# EAGLE board OTOduinoShield (EAGLE 5.11)
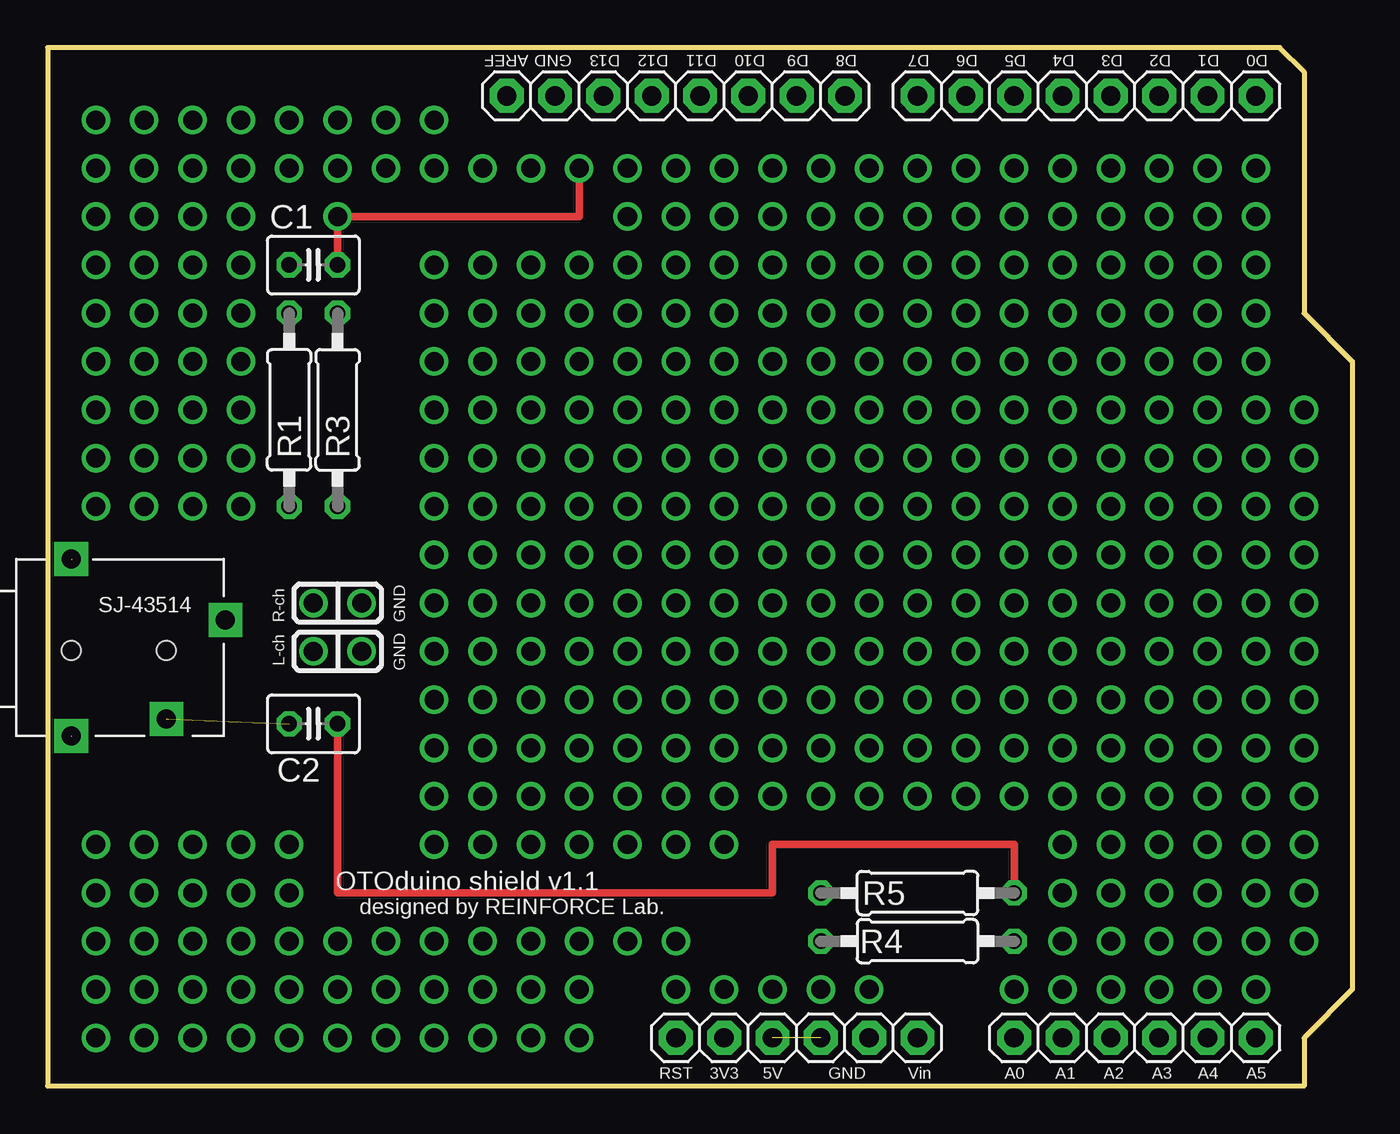
[diagram p0: board, top side]
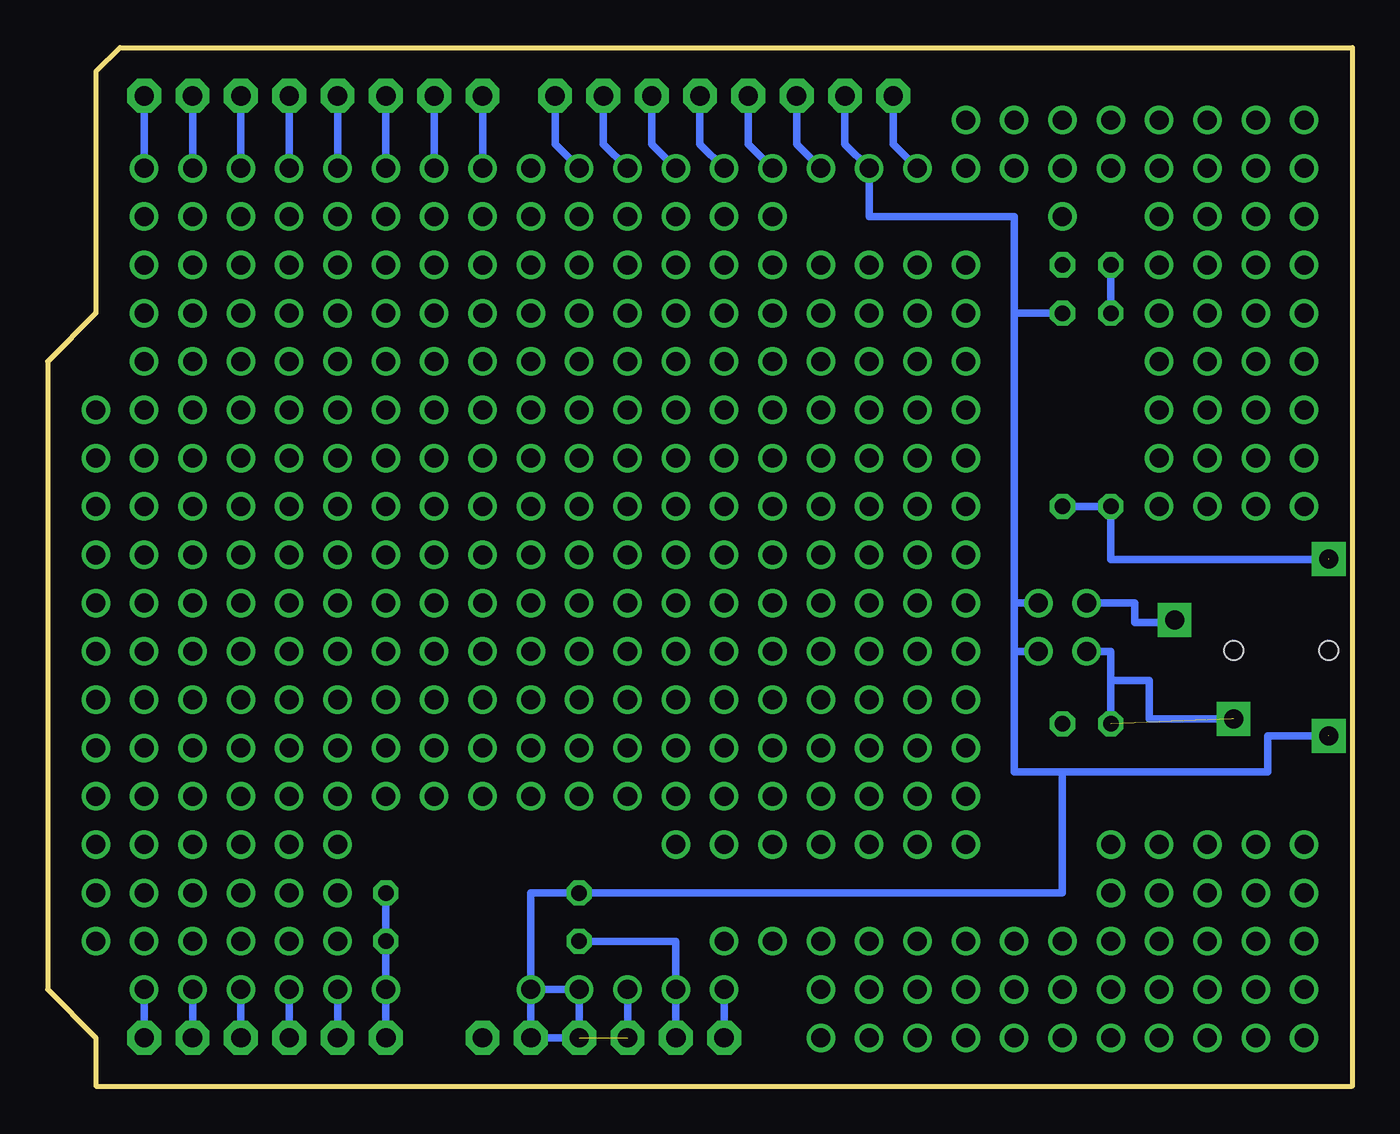
[diagram p1: board, bottom side, seen from below]

Size 68.58 x 54.61 mm. Coordinates in mm from the lower left corner, seen from the top.
Outline: 64.77,54.61 0,54.61 0,0 66.04,0 66.04,2.54 68.58,5.08 68.58,38.1 66.04,40.64 66.04,53.34 64.77,54.61
Copper layers (1*16): Top 0.035mm / dielectric 1.5mm / Bottom 0.035mm
Design rules "Fusion_eagle_rule_v1.1 *": minimum track width 6mil, minimum drill 12mil, track to track 6mil, track to pad 6mil, pad to pad 6mil, via to via 6mil, smd to smd 0mil, copper to edge 10mil, drill to drill 10mil, minimum pad ring 10mil, minimum via ring 6mil, stop-mask expansion 2mil, vias tented up to drill 100mil, thermal gap 10mil
Net classes: 1 power: width 0.254 mm

## Footprints (pad centres in the part's own frame; a part is rotated, then mirrored left to right if it is on the bottom)
C025-030X050 = drill 0.813 octagon: 1 -1.27,0; 2 1.27,0
1X06 = drill 1.016 pad 1.778 octagon: 1 -6.35,0; 2 -3.81,0; 3 -1.27,0; 4 1.27,0; 5 3.81,0; 6 6.35,0
1X08 = drill 1.016 pad 1.778 octagon: 1 -8.89,0; 2 -6.35,0; 3 -3.81,0; 4 -1.27,0; 5 1.27,0; 6 3.81,0; 7 6.35,0; 8 8.89,0
0207/10 = drill 0.813 octagon: 1 -5.08,0; 2 5.08,0
SJ43514 = drill 1 pad 1.778 square: P$1 10.998,6.096; P$4 7.899,0.889; P$5 2.896,9.296; P$6 2.896,0 | hole 1: 2.896,4.496; 7.899,4.496

## Placement (x,y rotation side)
C1  0.1uF  [C025-030X050]  13.97,43.18 0 top
C2  0.1uF  [C025-030X050]  13.97,19.05 0 top
JP10  POWER  [1X06]  39.37,2.54 180 top
JP11  ADC  [1X06]  57.15,2.54 180 top
JP12  IOH  [1X08]  33.02,52.07 180 top
JP13  IOL  [1X08]  54.61,52.07 180 top
R1  68k  [0207/10]  12.7,35.56 90 top
R3  1k  [0207/10]  15.24,35.56 270 top
R4  20k  [0207/10]  45.72,7.62 180 top
R5  20k  [0207/10]  45.72,10.16 0 top
U$3  SJ-43514  [SJ43514]  -1.65,18.41 0 top

## Library data of the parts
C1 C2 R1 R3-R5 = resistor
JP10-JP13 = pinhead2
U$3 = con-cui-audiojack

## Nets
+3V3: JP10.5 R4.2
+5V [power]: JP10.2 JP10.3 JP10.4 JP12.7 R3.1 R5.1 U$3.P$6
A0: C2.2 JP11.6 R4.1 R5.2
A1: JP11.5
A2: JP11.4
A3: JP11.3
A4: JP11.2
A5: JP11.1
AREF: JP12.8
D0: JP13.1
D1: JP13.2
D2: JP13.3
D3: JP13.4
D4: JP13.5
D5: JP13.6
D6: JP13.7
D7: JP13.8
D8: JP12.1
D9: JP12.2
D10: JP12.3
D11: JP12.4
D12: JP12.5
D13: C1.2 JP12.6
L_CH: C2.1 U$3.P$4
N$76: R1.1 R3.2 U$3.P$5
N$185: C1.1 R1.2
R_CH: U$3.P$1
RESET: JP10.6
VIN: JP10.1

## Tracks (layer width: path | path; a pad name or v marks a point on that pad's centre or on a via)
+3V3  (via drill 1)
  Bottom 0.406: JP10.5 v35.56,5.08 35.56,7.62 R4.2
+5V  (via drill 1)  (2 unrouted)
  Bottom 0.406: JP12.7 26.67,49.53 v25.4,48.26 25.4,45.72 17.78,45.72 17.78,40.64 | JP10.4 v38.1,5.08 | v43.18,5.08 JP10.2 JP10.3 v40.64,5.08 v43.18,5.08 | 17.78,40.64 R3.1 | 17.78,25.4 v16.51,25.4 | 17.78,25.4 17.78,40.64 | v43.18,5.08 43.18,10.16 R5.1 15.24,10.16 15.24,16.51 | 17.78,22.86 17.78,25.4 | 17.78,22.86 v16.51,22.86 | 17.78,22.86 17.78,16.51 15.24,16.51 | 15.24,16.51 4.45,16.51 4.45,18.41 1.27,18.41
A0  (via drill 1)
  Top 0.406: C2.2 15.24,10.16 38.1,10.16 38.1,12.7 50.8,12.7 R5.2
  Bottom 0.406: R5.2 R4.1 v50.8,5.08 JP11.6
A1  (via drill 1)
  Bottom 0.406: JP11.5 v53.34,5.08
A2  (via drill 1)
  Bottom 0.406: JP11.4 v55.88,5.08
A3  (via drill 1)
  Bottom 0.406: JP11.3 v58.42,5.08
A4  (via drill 1)
  Bottom 0.406: JP11.2 v60.96,5.08
A5  (via drill 1)
  Bottom 0.406: JP11.1 v63.5,5.08
AREF  (via drill 1)
  Bottom 0.406: JP12.8 24.13,49.53 v22.86,48.26
D0  (via drill 1)
  Bottom 0.406: v63.5,48.26 JP13.1
D1  (via drill 1)
  Bottom 0.406: v60.96,48.26 JP13.2
D2  (via drill 1)
  Bottom 0.406: v58.42,48.26 JP13.3
D3  (via drill 1)
  Bottom 0.406: v55.88,48.26 JP13.4
D4  (via drill 1)
  Bottom 0.406: v53.34,48.26 JP13.5
D5  (via drill 1)
  Bottom 0.406: v50.8,48.26 JP13.6
D6  (via drill 1)
  Bottom 0.406: v48.26,48.26 JP13.7
D7  (via drill 1)
  Bottom 0.406: v45.72,48.26 JP13.8
D8  (via drill 1)
  Bottom 0.406: JP12.1 41.91,49.53 v40.64,48.26
D9  (via drill 1)
  Bottom 0.406: JP12.2 39.37,49.53 v38.1,48.26
D10  (via drill 1)
  Bottom 0.406: JP12.3 36.83,49.53 v35.56,48.26
D11  (via drill 1)
  Bottom 0.406: JP12.4 34.29,49.53 v33.02,48.26
D12  (via drill 1)
  Bottom 0.406: JP12.5 31.75,49.53 v30.48,48.26
D13  (via drill 1)
  Top 0.406: v27.94,48.26 27.94,45.72 v15.24,45.72 C1.2
  Bottom 0.406: v27.94,48.26 29.21,49.53 JP12.6
L_CH  (via drill 1)  (2 unrouted)
  Bottom 0.406: v13.97,22.86 12.7,22.86 C2.1
N$1  (via drill 1)
  other vias: 20.32,25.4
N$2  (via drill 1)
  other vias: 20.32,43.18
N$3  (via drill 1)
  Bottom 0.406: v13.97,25.4 11.43,25.4 11.43,24.38 9.4,24.38
N$4  (via drill 1)
  other vias: 20.32,40.64
N$5  (via drill 1)
  other vias: 20.32,38.1
N$6  (via drill 1)
  other vias: 20.32,35.56
N$7  (via drill 1)
  other vias: 30.48,45.72
N$8  (via drill 1)
  other vias: 30.48,43.18
N$9  (via drill 1)
  other vias: 30.48,40.64
N$10  (via drill 1)
  other vias: 30.48,38.1
N$11  (via drill 1)
  other vias: 30.48,35.56
N$12  (via drill 1)
  other vias: 30.48,33.02
N$13  (via drill 1)
  other vias: 30.48,30.48
N$14  (via drill 1)
  other vias: 30.48,27.94
N$15  (via drill 1)
  other vias: 30.48,25.4
N$16  (via drill 1)
  other vias: 30.48,22.86
N$17  (via drill 1)
  other vias: 30.48,20.32
N$18  (via drill 1)
  other vias: 30.48,17.78
N$19  (via drill 1)
  other vias: 20.32,17.78
N$20  (via drill 1)
  other vias: 20.32,33.02
N$21  (via drill 1)
  other vias: 20.32,30.48
N$22  (via drill 1)
  other vias: 30.48,7.62
N$23  (via drill 1)
  other vias: 33.02,7.62
N$24  (via drill 1)
  other vias: 22.86,25.4
N$25  (via drill 1)
  other vias: 22.86,43.18
N$26  (via drill 1)
  other vias: 33.02,15.24
N$27  (via drill 1)
  other vias: 33.02,17.78
N$28  (via drill 1)
  other vias: 33.02,20.32
N$29  (via drill 1)
  other vias: 33.02,22.86
N$30  (via drill 1)
  other vias: 33.02,25.4
N$31  (via drill 1)
  other vias: 33.02,27.94
N$32  (via drill 1)
  other vias: 35.56,27.94
N$33  (via drill 1)
  other vias: 38.1,27.94
N$34  (via drill 1)
  other vias: 40.64,27.94
N$35  (via drill 1)
  other vias: 43.18,27.94
N$36  (via drill 1)
  other vias: 43.18,25.4
N$37  (via drill 1)
  other vias: 40.64,25.4
N$38  (via drill 1)
  other vias: 38.1,25.4
N$39  (via drill 1)
  other vias: 35.56,25.4
N$40  (via drill 1)
  other vias: 33.02,30.48
N$41  (via drill 1)
  other vias: 35.56,30.48
N$42  (via drill 1)
  other vias: 38.1,30.48
N$43  (via drill 1)
  other vias: 40.64,30.48
N$44  (via drill 1)
  other vias: 43.18,30.48
N$45  (via drill 1)
  other vias: 43.18,33.02
N$46  (via drill 1)
  other vias: 40.64,33.02
N$47  (via drill 1)
  other vias: 38.1,33.02
N$48  (via drill 1)
  other vias: 35.56,33.02
N$49  (via drill 1)
  other vias: 33.02,43.18
N$50  (via drill 1)
  other vias: 33.02,40.64
N$51  (via drill 1)
  other vias: 33.02,38.1
N$52  (via drill 1)
  other vias: 33.02,35.56
N$53  (via drill 1)
  other vias: 33.02,33.02
N$54  (via drill 1)
  other vias: 35.56,35.56
N$55  (via drill 1)
  other vias: 35.56,38.1
N$56  (via drill 1)
  other vias: 35.56,40.64
N$57  (via drill 1)
  other vias: 35.56,43.18
N$58  (via drill 1)
  other vias: 35.56,22.86
N$59  (via drill 1)
  other vias: 35.56,20.32
N$60  (via drill 1)
  other vias: 35.56,17.78
N$61  (via drill 1)
  other vias: 35.56,15.24
N$62  (via drill 1)
  other vias: 22.86,40.64
N$63  (via drill 1)
  other vias: 22.86,38.1
N$65  (via drill 1)
  other vias: 22.86,35.56
N$66  (via drill 1)
  other vias: 22.86,33.02
N$67  (via drill 1)
  other vias: 22.86,30.48
N$68  (via drill 1)
  other vias: 38.1,15.24
N$69  (via drill 1)
  other vias: 38.1,17.78
N$70  (via drill 1)
  other vias: 38.1,20.32
N$71  (via drill 1)
  other vias: 38.1,22.86
N$72  (via drill 1)
  other vias: 40.64,22.86
N$73  (via drill 1)
  other vias: 40.64,20.32
N$74  (via drill 1)
  other vias: 40.64,17.78
N$75  (via drill 1)
  other vias: 40.64,15.24
N$76  (1 unrouted)
  Bottom 0.406: 1.27,27.69 12.7,27.69 R1.1 R3.2
N$77  (via drill 1)
  other vias: 30.48,15.24
N$78  (via drill 1)
  other vias: 27.94,25.4
N$79  (via drill 1)
  other vias: 25.4,25.4
N$80  (via drill 1)
  other vias: 43.18,22.86
N$81  (via drill 1)
  other vias: 43.18,20.32
N$82  (via drill 1)
  other vias: 43.18,17.78
N$83  (via drill 1)
  other vias: 43.18,15.24
N$84  (via drill 1)
  other vias: 25.4,22.86
N$85  (via drill 1)
  other vias: 27.94,22.86
N$86  (via drill 1)
  other vias: 27.94,20.32
N$87  (via drill 1)
  other vias: 25.4,20.32
N$88  (via drill 1)
  other vias: 25.4,17.78
N$89  (via drill 1)
  other vias: 45.72,15.24
N$90  (via drill 1)
  other vias: 45.72,17.78
N$91  (via drill 1)
  other vias: 45.72,20.32
N$92  (via drill 1)
  other vias: 45.72,22.86
N$93  (via drill 1)
  other vias: 45.72,25.4
N$94  (via drill 1)
  other vias: 45.72,27.94
N$95  (via drill 1)
  other vias: 45.72,30.48
N$96  (via drill 1)
  other vias: 45.72,33.02
N$97  (via drill 1)
  other vias: 33.02,45.72
N$98  (via drill 1)
  other vias: 35.56,45.72
N$99  (via drill 1)
  other vias: 38.1,45.72
N$100  (via drill 1)
  other vias: 40.64,45.72
N$101  (via drill 1)
  other vias: 43.18,45.72
N$102  (via drill 1)
  other vias: 45.72,45.72
N$103  (via drill 1)
  other vias: 48.26,45.72
N$104  (via drill 1)
  other vias: 60.96,45.72
N$105  (via drill 1)
  other vias: 58.42,45.72
N$106  (via drill 1)
  other vias: 55.88,45.72
N$107  (via drill 1)
  other vias: 53.34,45.72
N$108  (via drill 1)
  other vias: 50.8,45.72
N$109  (via drill 1)
  other vias: 38.1,43.18
N$110  (via drill 1)
  other vias: 40.64,43.18
N$111  (via drill 1)
  other vias: 43.18,43.18
N$112  (via drill 1)
  other vias: 45.72,43.18
N$113  (via drill 1)
  other vias: 48.26,43.18
N$114  (via drill 1)
  other vias: 50.8,43.18
N$115  (via drill 1)
  other vias: 53.34,43.18
N$116  (via drill 1)
  other vias: 55.88,43.18
N$117  (via drill 1)
  other vias: 58.42,43.18
N$118  (via drill 1)
  other vias: 60.96,43.18
N$119  (via drill 1)
  other vias: 60.96,40.64
N$120  (via drill 1)
  other vias: 58.42,40.64
N$121  (via drill 1)
  other vias: 55.88,40.64
N$122  (via drill 1)
  other vias: 53.34,40.64
N$123  (via drill 1)
  other vias: 50.8,40.64
N$124  (via drill 1)
  other vias: 48.26,40.64
N$125  (via drill 1)
  other vias: 45.72,40.64
N$126  (via drill 1)
  other vias: 43.18,40.64
N$127  (via drill 1)
  other vias: 40.64,40.64
N$128  (via drill 1)
  other vias: 38.1,40.64
N$129  (via drill 1)
  other vias: 38.1,38.1
N$130  (via drill 1)
  other vias: 38.1,35.56
N$131  (via drill 1)
  other vias: 40.64,35.56
N$132  (via drill 1)
  other vias: 40.64,38.1
N$133  (via drill 1)
  other vias: 43.18,38.1
N$134  (via drill 1)
  other vias: 43.18,35.56
N$135  (via drill 1)
  other vias: 45.72,35.56
N$136  (via drill 1)
  other vias: 45.72,38.1
N$137  (via drill 1)
  other vias: 48.26,38.1
N$138  (via drill 1)
  other vias: 48.26,35.56
N$139  (via drill 1)
  other vias: 48.26,33.02
N$140  (via drill 1)
  other vias: 48.26,30.48
N$141  (via drill 1)
  other vias: 48.26,27.94
N$142  (via drill 1)
  other vias: 48.26,25.4
N$143  (via drill 1)
  other vias: 48.26,22.86
N$144  (via drill 1)
  other vias: 48.26,20.32
N$145  (via drill 1)
  other vias: 50.8,20.32
N$146  (via drill 1)
  other vias: 50.8,22.86
N$147  (via drill 1)
  other vias: 50.8,25.4
N$148  (via drill 1)
  other vias: 50.8,27.94
N$149  (via drill 1)
  other vias: 50.8,30.48
N$150  (via drill 1)
  other vias: 50.8,33.02
N$151  (via drill 1)
  other vias: 50.8,35.56
N$152  (via drill 1)
  other vias: 50.8,38.1
N$153  (via drill 1)
  other vias: 53.34,38.1
N$154  (via drill 1)
  other vias: 53.34,35.56
N$155  (via drill 1)
  other vias: 53.34,33.02
N$156  (via drill 1)
  other vias: 53.34,30.48
N$157  (via drill 1)
  other vias: 53.34,27.94
N$158  (via drill 1)
  other vias: 53.34,25.4
N$159  (via drill 1)
  other vias: 48.26,17.78
N$160  (via drill 1)
  other vias: 55.88,17.78
N$161  (via drill 1)
  other vias: 50.8,17.78
N$162  (via drill 1)
  other vias: 53.34,17.78
N$163  (via drill 1)
  other vias: 53.34,20.32
N$164  (via drill 1)
  other vias: 53.34,22.86
N$165  (via drill 1)
  other vias: 55.88,20.32
N$166  (via drill 1)
  other vias: 55.88,25.4
N$167  (via drill 1)
  other vias: 55.88,27.94
N$168  (via drill 1)
  other vias: 55.88,30.48
N$169  (via drill 1)
  other vias: 55.88,33.02
N$170  (via drill 1)
  other vias: 55.88,35.56
N$171  (via drill 1)
  other vias: 55.88,38.1
N$172  (via drill 1)
  other vias: 58.42,38.1
N$173  (via drill 1)
  other vias: 58.42,35.56
N$174  (via drill 1)
  other vias: 58.42,33.02
N$175  (via drill 1)
  other vias: 58.42,30.48
N$176  (via drill 1)
  other vias: 58.42,27.94
N$177  (via drill 1)
  other vias: 58.42,25.4
N$178  (via drill 1)
  other vias: 58.42,22.86
N$179  (via drill 1)
  other vias: 55.88,22.86
N$180  (via drill 1)
  other vias: 58.42,20.32
N$181  (via drill 1)
  other vias: 58.42,17.78
N$182  (via drill 1)
  other vias: 27.94,17.78
N$183  (via drill 1)
  other vias: 27.94,15.24
N$184  (via drill 1)
  other vias: 22.86,27.94
N$185
  Bottom 0.406: R1.2 C1.1
N$186  (via drill 1)
  other vias: 25.4,15.24
N$187  (via drill 1)
  other vias: 22.86,15.24
N$188  (via drill 1)
  other vias: 22.86,17.78
N$189  (via drill 1)
  other vias: 22.86,20.32
N$191  (via drill 1)
  other vias: 22.86,22.86
N$192  (via drill 1)
  other vias: 20.32,27.94
N$193  (via drill 1)
  other vias: 27.94,43.18
N$194  (via drill 1)
  other vias: 20.32,50.8
N$195  (via drill 1)
  other vias: 27.94,40.64
N$196  (via drill 1)
  other vias: 27.94,38.1
N$197  (via drill 1)
  other vias: 20.32,22.86
N$198  (via drill 1)
  other vias: 20.32,20.32
N$199  (via drill 1)
  other vias: 48.26,15.24
N$200  (via drill 1)
  other vias: 53.34,15.24
N$201  (via drill 1)
  other vias: 50.8,15.24
N$202  (via drill 1)
  other vias: 53.34,12.7
N$203  (via drill 1)
  other vias: 55.88,15.24
N$204  (via drill 1)
  other vias: 55.88,12.7
N$205  (via drill 1)
  other vias: 55.88,10.16
N$206  (via drill 1)
  other vias: 53.34,10.16
N$207  (via drill 1)
  other vias: 53.34,7.62
N$208  (via drill 1)
  other vias: 55.88,7.62
N$209  (via drill 1)
  other vias: 27.94,35.56
N$210  (via drill 1)
  other vias: 27.94,33.02
N$211  (via drill 1)
  other vias: 58.42,7.62
N$212  (via drill 1)
  other vias: 58.42,10.16
N$213  (via drill 1)
  other vias: 58.42,12.7
N$214  (via drill 1)
  other vias: 58.42,15.24
N$215  (via drill 1)
  other vias: 27.94,30.48
N$216  (via drill 1)
  other vias: 27.94,27.94
N$217  (via drill 1)
  other vias: 63.5,7.62
N$218  (via drill 1)
  other vias: 60.96,7.62
N$219  (via drill 1)
  other vias: 60.96,10.16
N$220  (via drill 1)
  other vias: 63.5,10.16
N$221  (via drill 1)
  other vias: 63.5,12.7
N$222  (via drill 1)
  other vias: 60.96,12.7
N$223  (via drill 1)
  other vias: 60.96,15.24
N$224  (via drill 1)
  other vias: 63.5,15.24
N$225  (via drill 1)
  other vias: 63.5,17.78
N$226  (via drill 1)
  other vias: 60.96,17.78
N$227  (via drill 1)
  other vias: 60.96,20.32
N$228  (via drill 1)
  other vias: 63.5,20.32
N$229  (via drill 1)
  other vias: 63.5,22.86
N$230  (via drill 1)
  other vias: 60.96,22.86
N$231  (via drill 1)
  other vias: 60.96,25.4
N$232  (via drill 1)
  other vias: 63.5,25.4
N$233  (via drill 1)
  other vias: 63.5,27.94
N$234  (via drill 1)
  other vias: 60.96,27.94
N$235  (via drill 1)
  other vias: 60.96,30.48
N$236  (via drill 1)
  other vias: 63.5,30.48
N$237  (via drill 1)
  other vias: 63.5,33.02
N$238  (via drill 1)
  other vias: 60.96,33.02
N$239  (via drill 1)
  other vias: 60.96,35.56
N$240  (via drill 1)
  other vias: 63.5,35.56
N$241  (via drill 1)
  other vias: 63.5,38.1
N$242  (via drill 1)
  other vias: 60.96,38.1
N$243  (via drill 1)
  other vias: 66.04,35.56
N$244  (via drill 1)
  other vias: 66.04,33.02
N$245  (via drill 1)
  other vias: 66.04,30.48
N$246  (via drill 1)
  other vias: 66.04,27.94
N$247  (via drill 1)
  other vias: 66.04,25.4
N$248  (via drill 1)
  other vias: 66.04,22.86
N$249  (via drill 1)
  other vias: 66.04,20.32
N$250  (via drill 1)
  other vias: 66.04,17.78
N$251  (via drill 1)
  other vias: 66.04,15.24
N$252  (via drill 1)
  other vias: 66.04,12.7
N$253  (via drill 1)
  other vias: 66.04,10.16
N$254  (via drill 1)
  other vias: 66.04,7.62
N$255  (via drill 1)
  other vias: 63.5,45.72
N$256  (via drill 1)
  other vias: 63.5,43.18
N$257  (via drill 1)
  other vias: 63.5,40.64
N$258  (via drill 1)
  other vias: 20.32,12.7
N$259  (via drill 1)
  other vias: 27.94,7.62
N$260  (via drill 1)
  other vias: 27.94,5.08
N$261  (via drill 1)
  other vias: 27.94,2.54
N$262  (via drill 1)
  other vias: 25.4,2.54
N$263  (via drill 1)
  other vias: 25.4,5.08
N$264  (via drill 1)
  other vias: 25.4,7.62
N$265  (via drill 1)
  other vias: 22.86,12.7
N$266  (via drill 1)
  other vias: 25.4,12.7
N$267  (via drill 1)
  other vias: 27.94,12.7
N$268  (via drill 1)
  other vias: 30.48,12.7
N$269  (via drill 1)
  other vias: 33.02,12.7
N$270  (via drill 1)
  other vias: 12.7,10.16
N$271  (via drill 1)
  other vias: 10.16,10.16
N$272  (via drill 1)
  other vias: 7.62,10.16
N$273  (via drill 1)
  other vias: 22.86,7.62
N$274  (via drill 1)
  other vias: 20.32,7.62
N$275  (via drill 1)
  other vias: 17.78,7.62
N$276  (via drill 1)
  other vias: 15.24,7.62
N$277  (via drill 1)
  other vias: 10.16,7.62
N$278  (via drill 1)
  other vias: 12.7,7.62
N$279  (via drill 1)
  other vias: 12.7,5.08
N$280  (via drill 1)
  other vias: 17.78,5.08
N$281  (via drill 1)
  other vias: 15.24,5.08
N$282  (via drill 1)
  other vias: 20.32,5.08
N$283  (via drill 1)
  other vias: 22.86,5.08
N$284  (via drill 1)
  other vias: 22.86,2.54
N$285  (via drill 1)
  other vias: 20.32,2.54
N$286  (via drill 1)
  other vias: 17.78,2.54
N$287  (via drill 1)
  other vias: 15.24,2.54
N$288  (via drill 1)
  other vias: 12.7,2.54
N$289  (via drill 1)
  other vias: 10.16,2.54
N$290  (via drill 1)
  other vias: 10.16,5.08
N$291  (via drill 1)
  other vias: 7.62,7.62
N$292  (via drill 1)
  other vias: 7.62,5.08
N$293  (via drill 1)
  other vias: 7.62,2.54
N$294  (via drill 1)
  other vias: 2.54,2.54
N$295  (via drill 1)
  other vias: 5.08,2.54
N$296  (via drill 1)
  other vias: 5.08,5.08
N$297  (via drill 1)
  other vias: 2.54,5.08
N$298  (via drill 1)
  other vias: 2.54,7.62
N$299  (via drill 1)
  other vias: 5.08,7.62
N$300  (via drill 1)
  other vias: 5.08,10.16
N$301  (via drill 1)
  other vias: 2.54,10.16
N$302  (via drill 1)
  other vias: 2.54,12.7
N$303  (via drill 1)
  other vias: 5.08,12.7
N$304  (via drill 1)
  other vias: 7.62,12.7
N$305  (via drill 1)
  other vias: 10.16,12.7
N$306  (via drill 1)
  other vias: 35.56,12.7
N$307  (via drill 1)
  other vias: 12.7,12.7
N$308  (via drill 1)
  other vias: 25.4,43.18
N$309  (via drill 1)
  other vias: 25.4,40.64
N$310  (via drill 1)
  other vias: 20.32,48.26
N$311  (via drill 1)
  other vias: 43.18,48.26
N$312  (via drill 1)
  other vias: 2.54,30.48
N$313  (via drill 1)
  other vias: 5.08,30.48
N$314  (via drill 1)
  other vias: 7.62,30.48
N$315  (via drill 1)
  other vias: 10.16,30.48
N$316  (via drill 1)
  other vias: 20.32,15.24
N$317  (via drill 1)
  other vias: 25.4,38.1
N$318  (via drill 1)
  other vias: 25.4,35.56
N$319  (via drill 1)
  other vias: 25.4,33.02
N$320  (via drill 1)
  other vias: 25.4,30.48
N$321  (via drill 1)
  other vias: 25.4,27.94
N$324  (via drill 1)
  other vias: 2.54,35.56
N$325  (via drill 1)
  other vias: 2.54,50.8
N$326  (via drill 1)
  other vias: 2.54,48.26
N$327  (via drill 1)
  other vias: 2.54,45.72
N$328  (via drill 1)
  other vias: 2.54,43.18
N$329  (via drill 1)
  other vias: 2.54,40.64
N$330  (via drill 1)
  other vias: 2.54,38.1
N$331  (via drill 1)
  other vias: 2.54,33.02
N$332  (via drill 1)
  other vias: 5.08,33.02
N$333  (via drill 1)
  other vias: 5.08,38.1
N$334  (via drill 1)
  other vias: 5.08,35.56
N$335  (via drill 1)
  other vias: 7.62,35.56
N$336  (via drill 1)
  other vias: 7.62,38.1
N$337  (via drill 1)
  other vias: 7.62,40.64
N$338  (via drill 1)
  other vias: 5.08,40.64
N$339  (via drill 1)
  other vias: 5.08,43.18
N$340  (via drill 1)
  other vias: 5.08,45.72
N$341  (via drill 1)
  other vias: 5.08,48.26
N$342  (via drill 1)
  other vias: 5.08,50.8
N$343  (via drill 1)
  other vias: 10.16,50.8
N$344  (via drill 1)
  other vias: 7.62,50.8
N$345  (via drill 1)
  other vias: 7.62,48.26
N$346  (via drill 1)
  other vias: 10.16,48.26
N$347  (via drill 1)
  other vias: 12.7,50.8
N$348  (via drill 1)
  other vias: 12.7,48.26
N$350  (via drill 1)
  other vias: 7.62,45.72
N$351  (via drill 1)
  other vias: 7.62,43.18
N$352  (via drill 1)
  other vias: 10.16,43.18
N$353  (via drill 1)
  other vias: 10.16,45.72
N$354  (via drill 1)
  other vias: 10.16,40.64
N$355  (via drill 1)
  other vias: 10.16,38.1
N$356  (via drill 1)
  other vias: 10.16,35.56
N$357  (via drill 1)
  other vias: 10.16,33.02
N$358  (via drill 1)
  other vias: 7.62,33.02
N$359  (via drill 1)
  other vias: 15.24,50.8
N$360  (via drill 1)
  other vias: 15.24,48.26
N$361  (via drill 1)
  other vias: 17.78,48.26
N$362  (via drill 1)
  other vias: 17.78,50.8
RESET  (via drill 1)
  Bottom 0.406: JP10.6 v33.02,5.08
S$1
  Bottom 0.406: 6.35,19.3 10.67,19.3 10.67,21.34 12.7,21.34

## Text on the board
tPlace: AREF | GND | D13 | D12 | D11 | D10 | D9 | D8 | D7 | D6 | D5 | D4 | D3 | D2 | D1 | D0 | SJ-43514 | R-ch | GND | L-ch | GND | OTOduino shield v1.1 | designed by REINFORCE Lab. | RST | 3V3 | 5V | GND | Vin | A0 | A1 | A2 | A3 | A4 | A5